# EAGLE board rgbstripcontroller-display (EAGLE 8.3.2)
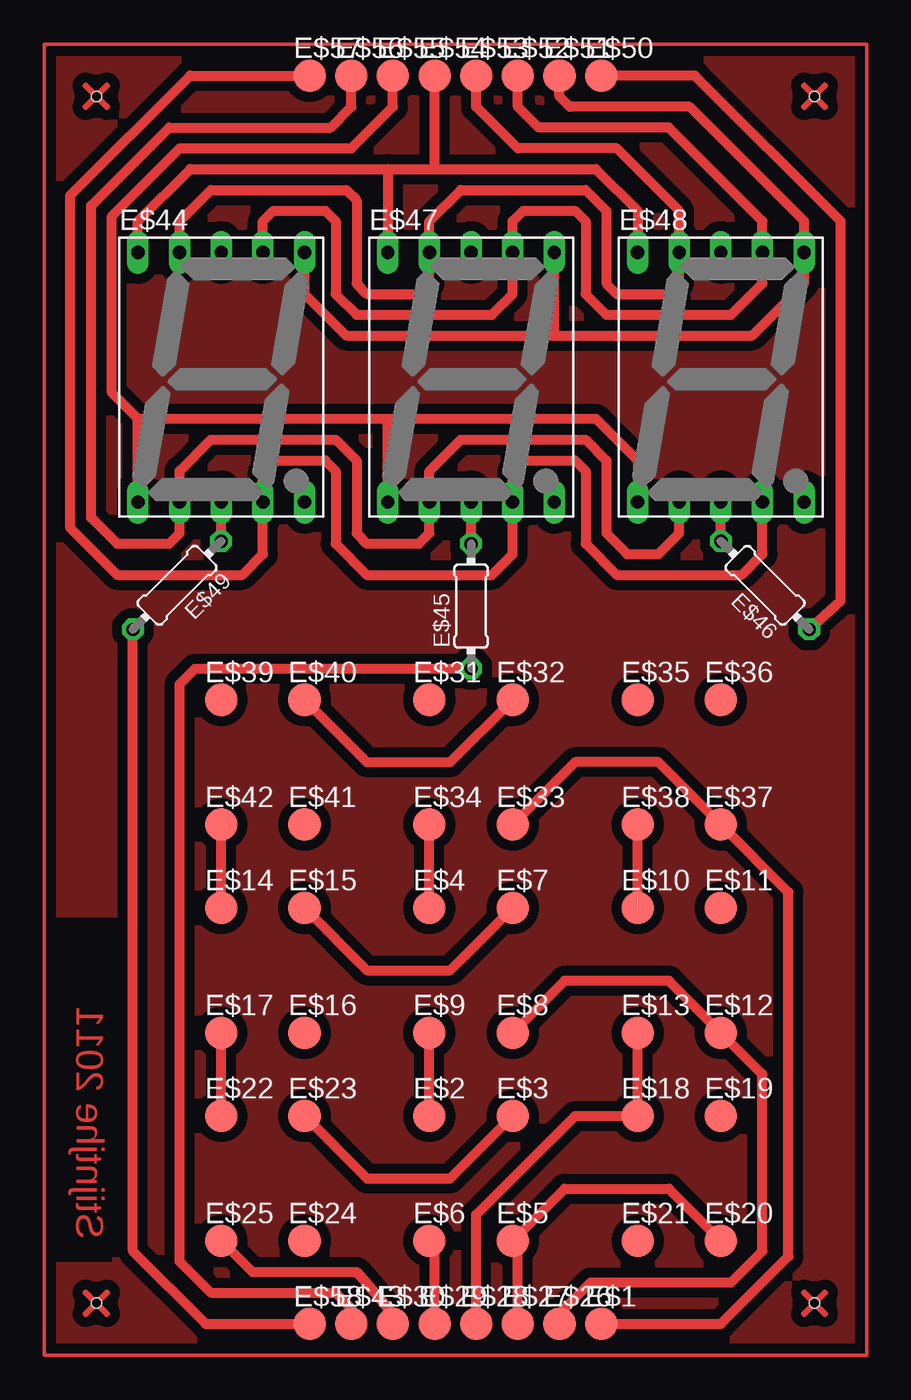
[diagram p0: board, top side]

No outline drawn. Coordinates in mm, seen from the top.
Copper layers (1*16): Top 0.035mm / dielectric 1.5mm / Bottom 0.035mm
Design rules "default": minimum track width 10mil, minimum drill 24mil, track to track 8mil, track to pad 8mil, pad to pad 8mil, via to via 8mil, smd to smd 8mil, copper to edge 40mil, drill to drill 8mil, minimum pad ring 10mil, minimum via ring 8mil, stop-mask expansion 4mil, vias tented up to drill 0mil, thermal gap 10mil
Holes 0.6 mm at 3.17,76.83 46.99,76.83 46.99,3.17 3.17,3.17

## Footprints (pad centres in the part's own frame; a part is rotated, then mirrored left to right if it is on the bottom)
TP20R = smd 2 x 2: TP 0,0
HDSP-M = drill 0.813 long: 1 -5.08,-7.62; 2 -2.54,-7.62; 3 0,-7.62; 4 2.54,-7.62; 5 5.08,-7.62; 6 5.08,7.62; 7 2.54,7.62; 8 0,7.62; 9 -2.54,7.62; 10 -5.08,7.62
0204/7 = drill 0.813 octagon: 1 -3.81,0; 2 3.81,0

## Placement (x,y rotation side)
E$1  [TP20R]  33.97,1.91 0 top
E$2  [TP20R]  23.5,14.61 0 top
E$3  [TP20R]  28.57,14.61 0 top
E$4  [TP20R]  23.5,27.3 0 top
E$5  [TP20R]  28.57,6.99 0 top
E$6  [TP20R]  23.5,6.99 0 top
E$7  [TP20R]  28.57,27.3 0 top
E$8  [TP20R]  28.57,19.68 0 top
E$9  [TP20R]  23.5,19.68 0 top
E$10  [TP20R]  36.2,27.3 0 top
E$11  [TP20R]  41.27,27.3 0 top
E$12  [TP20R]  41.27,19.68 0 top
E$13  [TP20R]  36.2,19.68 0 top
E$14  [TP20R]  10.79,27.3 0 top
E$15  [TP20R]  15.88,27.3 0 top
E$16  [TP20R]  15.88,19.68 0 top
E$17  [TP20R]  10.79,19.68 0 top
E$18  [TP20R]  36.2,14.61 0 top
E$19  [TP20R]  41.27,14.61 0 top
E$20  [TP20R]  41.27,6.99 0 top
E$21  [TP20R]  36.2,6.99 0 top
E$22  [TP20R]  10.79,14.61 0 top
E$23  [TP20R]  15.88,14.61 0 top
E$24  [TP20R]  15.88,6.99 0 top
E$25  [TP20R]  10.79,6.99 0 top
E$26  [TP20R]  31.43,1.91 0 top
E$27  [TP20R]  28.89,1.91 0 top
E$28  [TP20R]  26.35,1.91 0 top
E$29  [TP20R]  23.81,1.91 0 top
E$30  [TP20R]  21.27,1.91 0 top
E$31  [TP20R]  23.5,40.01 0 top
E$32  [TP20R]  28.57,40.01 0 top
E$33  [TP20R]  28.57,32.38 0 top
E$34  [TP20R]  23.5,32.38 0 top
E$35  [TP20R]  36.2,40.01 0 top
E$36  [TP20R]  41.27,40.01 0 top
E$37  [TP20R]  41.27,32.38 0 top
E$38  [TP20R]  36.2,32.38 0 top
E$39  [TP20R]  10.79,40.01 0 top
E$40  [TP20R]  15.88,40.01 0 top
E$41  [TP20R]  15.88,32.38 0 top
E$42  [TP20R]  10.79,32.38 0 top
E$43  [TP20R]  18.73,1.91 0 top
E$44  [HDSP-M]  10.79,59.69 0 top
E$45  [0204/7]  26.04,45.72 90 top
E$46  [0204/7]  43.97,46.99 135 top
E$47  [HDSP-M]  26.04,59.69 0 top
E$48  [HDSP-M]  41.27,59.69 0 top
E$49  [0204/7]  8.1,46.99 225 top
E$50  [TP20R]  33.97,78.11 0 top
E$51  [TP20R]  31.43,78.11 0 top
E$52  [TP20R]  28.89,78.11 0 top
E$53  [TP20R]  26.35,78.11 0 top
E$54  [TP20R]  23.81,78.11 0 top
E$55  [TP20R]  21.27,78.11 0 top
E$56  [TP20R]  18.73,78.11 0 top
E$57  [TP20R]  16.19,78.11 0 top
E$58  [TP20R]  16.19,1.91 0 top

## Library data of the parts
E$1-E$43 E$50-E$58 = testpad
E$44 E$47 E$48 = display-hp
E$45 E$46 E$49 = resistor

## Nets
S$1: E$7.TP E$15.TP
S$3: E$46.1 E$50.TP
S$4: E$25.TP
S$5: E$8.TP E$12.TP
S$6: E$6.TP
S$7: E$5.TP E$20.TP E$27.TP
S$8: E$3.TP E$23.TP
S$10: E$45.1
S$11: E$14.TP E$42.TP
S$12: E$2.TP E$9.TP
S$13: E$33.TP E$37.TP
S$14: E$17.TP E$22.TP
S$15: E$4.TP E$34.TP
S$16: E$10.TP E$38.TP
S$17: E$32.TP E$40.TP
S$18: E$13.TP E$18.TP E$28.TP
S$19: E$44.4 E$47.4 E$48.4
S$20: E$44.2 E$47.2 E$48.2
S$21: E$44.1 E$48.1
S$22: E$47.1
S$23: E$44.6 E$47.6 E$48.6
S$24: E$44.7 E$47.7 E$48.7
S$25: E$44.9 E$47.9 E$48.9
S$26: E$44.10 E$47.10 E$48.10
S$27: E$45.2 E$47.3
S$28: E$46.2 E$48.3
S$29: E$44.3 E$49.1
S$31: E$58.TP

## Tracks (layer width: path | path; a pad name or v marks a point on that pad's centre or on a via)
S1
  Top 0.203: 0,0 0,80.01 50.16,80.01 50.16,0 0,0
S$1
  Top 0.61: E$15.TP 19.68,23.5 24.77,23.5 E$7.TP
S$2
  pour Top (isolate 0.61): 50.16,80.01 50.16,0 0,0 0,5.4 4.45,5.4 4.45,26.99 0,26.99 0,80.01
S$3
  Top 0.61: E$46.1 48.58,46.04 48.58,69.22 39.69,78.11 E$50.TP
S$4
  Top 0.61: 21.27,1.91 21.27,2.54 19.05,5.08 12.7,5.08 E$25.TP
S$5
  Top 0.406: E$12.TP 41.91,19.05 | 28.57,19.05 29.21,19.68 E$8.TP 28.57,19.05
  Top 0.61: E$8.TP 31.75,22.86 38.1,22.86 E$12.TP 43.81,17.14 43.81,6.35 41.91,4.45 33.34,4.45 31.43,2.54
S$6
  Top 0.61: E$6.TP 23.81,6.67 23.81,2.86
S$7
  Top 0.406: E$20.TP 41.27,6.35
  Top 0.61: E$20.TP 38.1,10.16 31.75,10.16 E$5.TP 28.89,6.67 E$27.TP
S$8
  Top 0.61: E$23.TP 19.68,10.79 24.77,10.79 E$3.TP
S$9
  Top 0.61: 28.89,1.91 28.89,2.54
S$10
  Top 0.61: E$45.1 9.21,41.91 8.26,40.96
S$11
  Top 0.61: E$14.TP E$42.TP
S$12
  Top 0.61: E$2.TP E$9.TP
S$13
  Top 0.406: E$37.TP 41.91,31.75 | 28.57,31.75 29.21,32.38 E$33.TP 28.57,31.75
  Top 0.61: E$33.TP 32.38,36.2 37.47,36.2 E$37.TP 45.4,28.26 45.4,6.03 41.27,1.91 34.92,1.91
S$14
  Top 0.61: E$22.TP E$17.TP
S$15
  Top 0.61: E$4.TP E$34.TP
S$16  (1 unrouted)
  Top 0.406: 35.56,27.3 36.2,27.94
  Top 0.61: 36.2,27.94 E$38.TP
S$17
  Top 0.61: E$40.TP 19.68,36.2 24.77,36.2 E$32.TP
S$18
  Top 0.61: 26.35,2.54 E$28.TP 26.35,8.57 32.38,14.61 E$18.TP E$13.TP
S$19
  Top 0.61: E$48.4 43.81,48.9 42.55,47.62 34.92,47.62 33.02,49.53 33.02,53.98 32.38,54.61 29.21,54.61 28.57,53.98 E$47.4 28.57,48.9 27.3,47.62 19.68,47.62 17.78,49.53 17.78,53.98 17.14,54.61 13.97,54.61 13.34,53.98 E$44.4 13.34,48.9 12.06,47.62 4.45,47.62 1.59,50.48 1.59,70.8 8.89,78.11 16.51,78.11
S$20
  Top 0.61: E$48.2 38.73,50.16 37.47,48.9 35.56,48.9 34.29,50.16 34.29,54.61 33.02,55.88 25.4,55.88 23.5,53.98 E$47.2 23.5,50.16 22.86,49.53 19.68,49.53 19.05,50.16 19.05,54.61 17.78,55.88 10.16,55.88 8.26,53.98 E$44.2 8.26,50.16 7.62,49.53 4.45,49.53 2.86,51.12 2.86,70.17 7.62,74.93 17.46,74.93 18.73,76.2 18.73,78.11
S$21
  Top 0.61: E$48.1 36.2,54.61 33.66,57.15 5.71,57.15 | E$44.1 5.71,57.15 | 21.27,78.11 21.27,76.2 18.73,73.66 8.26,73.66 4.13,69.53 4.13,58.74 5.71,57.15
S$22
  Top 0.61: E$47.1 20.95,57.15
S$23
  Top 0.61: 31.11,62.23 E$47.6 | 31.11,62.23 43.18,62.23 46.35,65.41 E$48.6 46.35,69.22 39.37,76.2 32.07,76.2 31.43,76.83 31.43,78.11 | E$44.6 15.88,64.77 18.41,62.23 31.11,62.23
S$24
  Top 0.61: E$44.7 13.34,69.22 13.97,69.85 17.14,69.85 17.78,69.22 17.78,64.77 19.05,63.5 27.3,63.5 28.57,64.77 E$47.7 28.57,69.22 29.21,69.85 32.38,69.85 33.02,69.22 33.02,64.77 34.29,63.5 41.91,63.5 43.81,65.41 E$48.7 43.81,69.22 38.1,74.93 30.16,74.93 28.89,76.2 28.89,78.11
S$25
  Top 0.61: E$44.9 8.26,69.22 10.16,71.12 18.41,71.12 19.05,70.48 19.05,65.41 19.68,64.77 22.86,64.77 23.5,65.41 E$47.9 23.5,69.22 25.4,71.12 33.02,71.12 34.29,69.85 34.29,65.41 34.92,64.77 38.1,64.77 38.73,65.41 E$48.9 38.73,69.85 34.92,73.66 28.89,73.66 26.35,76.2 26.35,78.11
S$26
  Top 0.61: E$44.10 5.71,69.22 8.89,72.39 20.95,72.39 | 20.95,72.39 E$47.10 | E$48.10 36.2,69.85 33.66,72.39 23.81,72.39 | 20.95,72.39 23.81,72.39 | 23.81,72.39 23.81,78.11
S$27
  Top 0.61: E$45.2 E$47.3
S$28
  Top 0.61: E$46.2 E$48.3
S$29
  Top 0.61: E$49.1 E$44.3
S$30
  Top 0.61: 18.73,1.91 18.73,2.86 17.78,3.81 10.16,3.81 8.26,5.71 8.26,40.96
S$31
  Top 0.61: 5.4,44.13 5.4,6.35 9.84,1.91 E$58.TP
S$32
  Top 0.406: 3.81,77.47 2.54,76.2
S$33
  Top 0.406: 3.81,76.2 2.54,77.47
S$34
  Top 0.406: 46.35,77.47 47.62,76.2
S$35
  Top 0.406: 47.62,77.47 46.35,76.2
S$36
  Top 0.406: 46.35,2.54 47.62,3.81
S$37
  Top 0.406: 46.35,3.81 47.62,2.54
S$38
  Top 0.406: 2.54,2.54 3.81,3.81
S$39
  Top 0.406: 3.81,2.54 2.54,3.81

## Text on the board
Top: Stijntjhe 2011